# Altium PCB Solar_PowerBoard_JK.PcbDoc
Units mil, origin at the board's own origin, x right, y up, seen from the top; angles counter-clockwise.
Board outline 1417.32 x 2000 mil, 2 copper layers (Top Layer, Bottom Layer), stack 68.512 mil thick; 32 components, 10 nets, 67 pads, 329 vias.
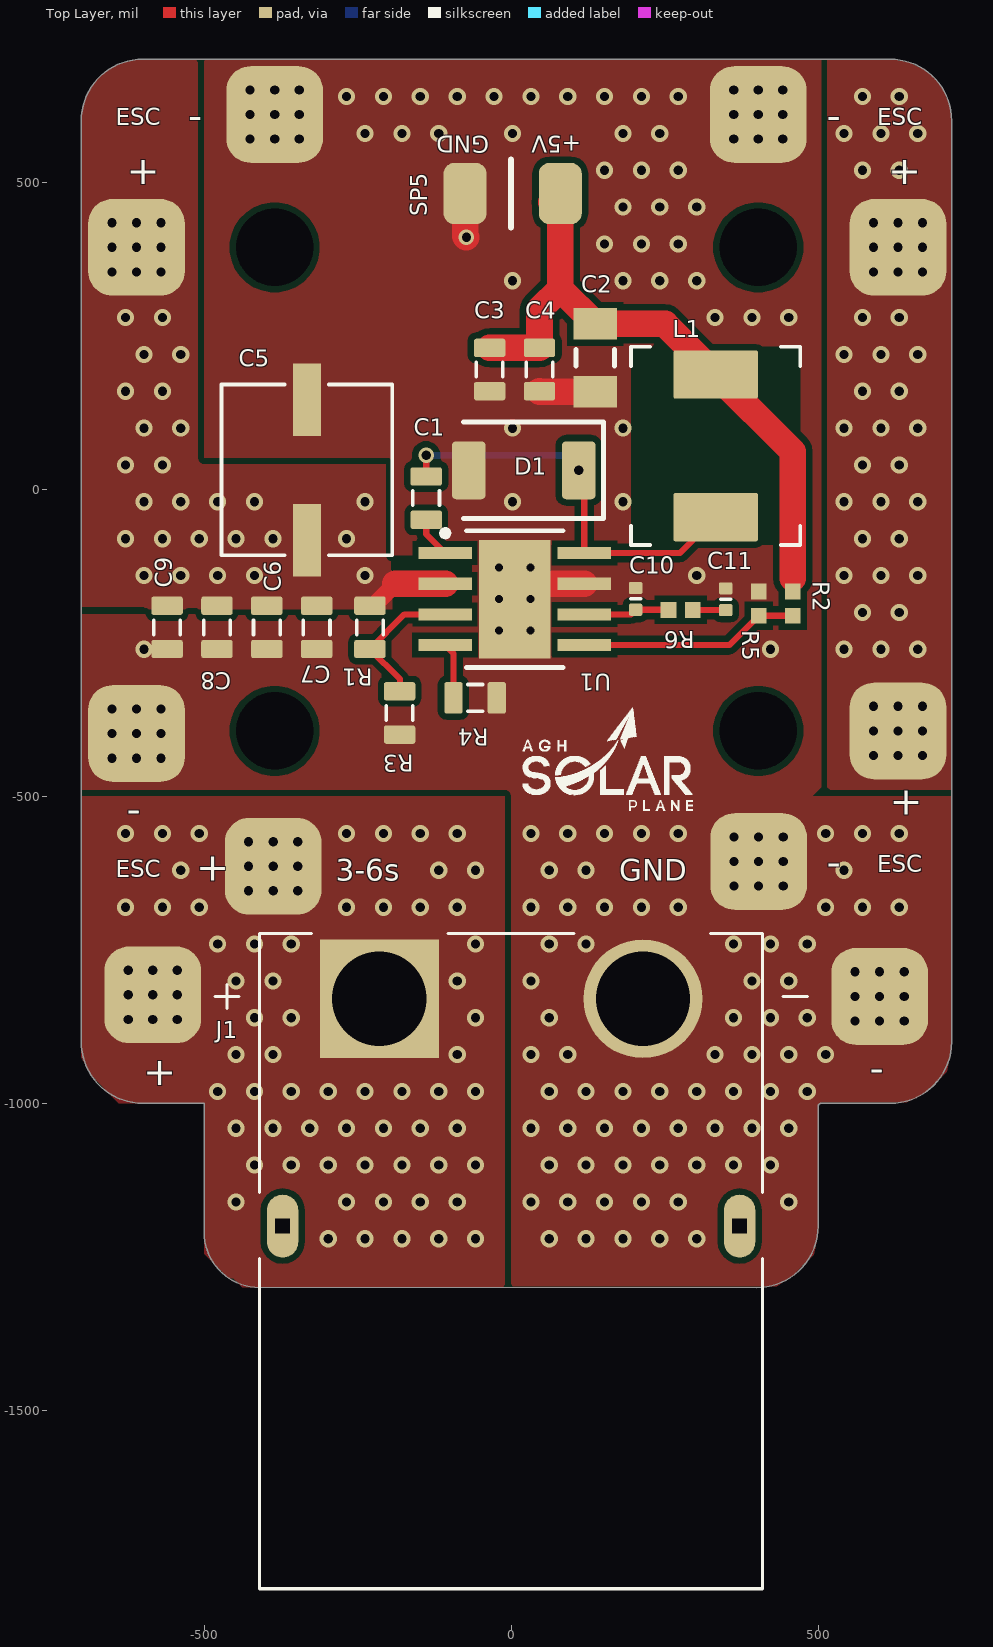
[diagram p0: Top Layer view]
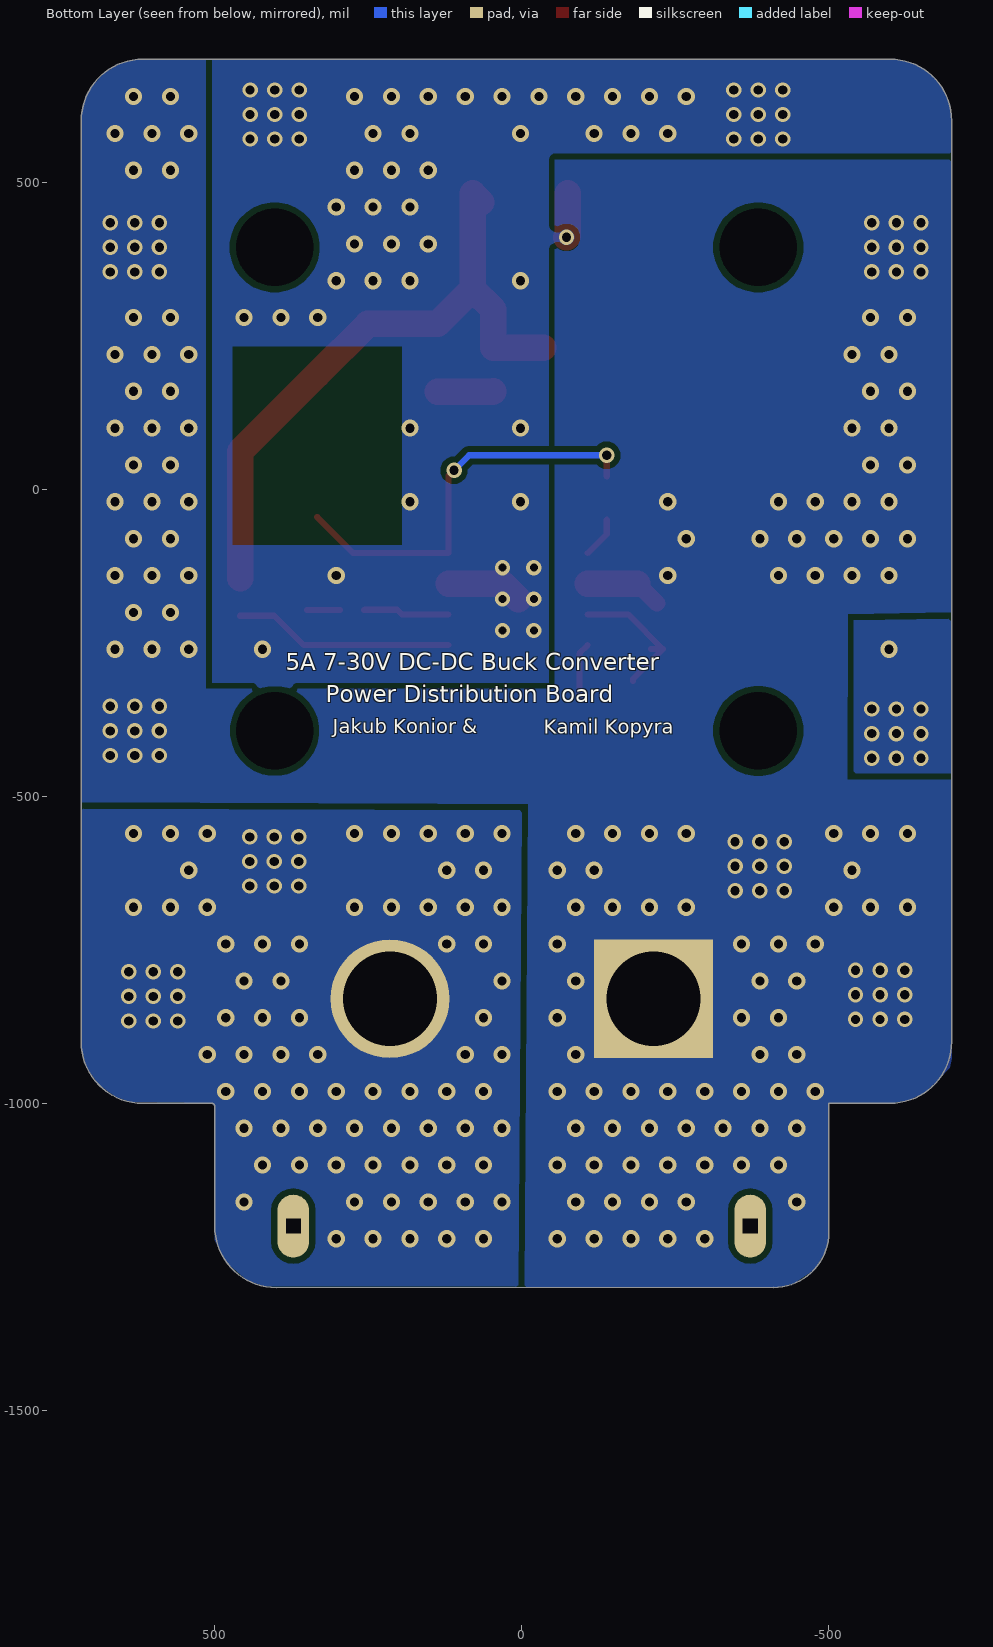
[diagram p1: Bottom Layer view, seen from below]
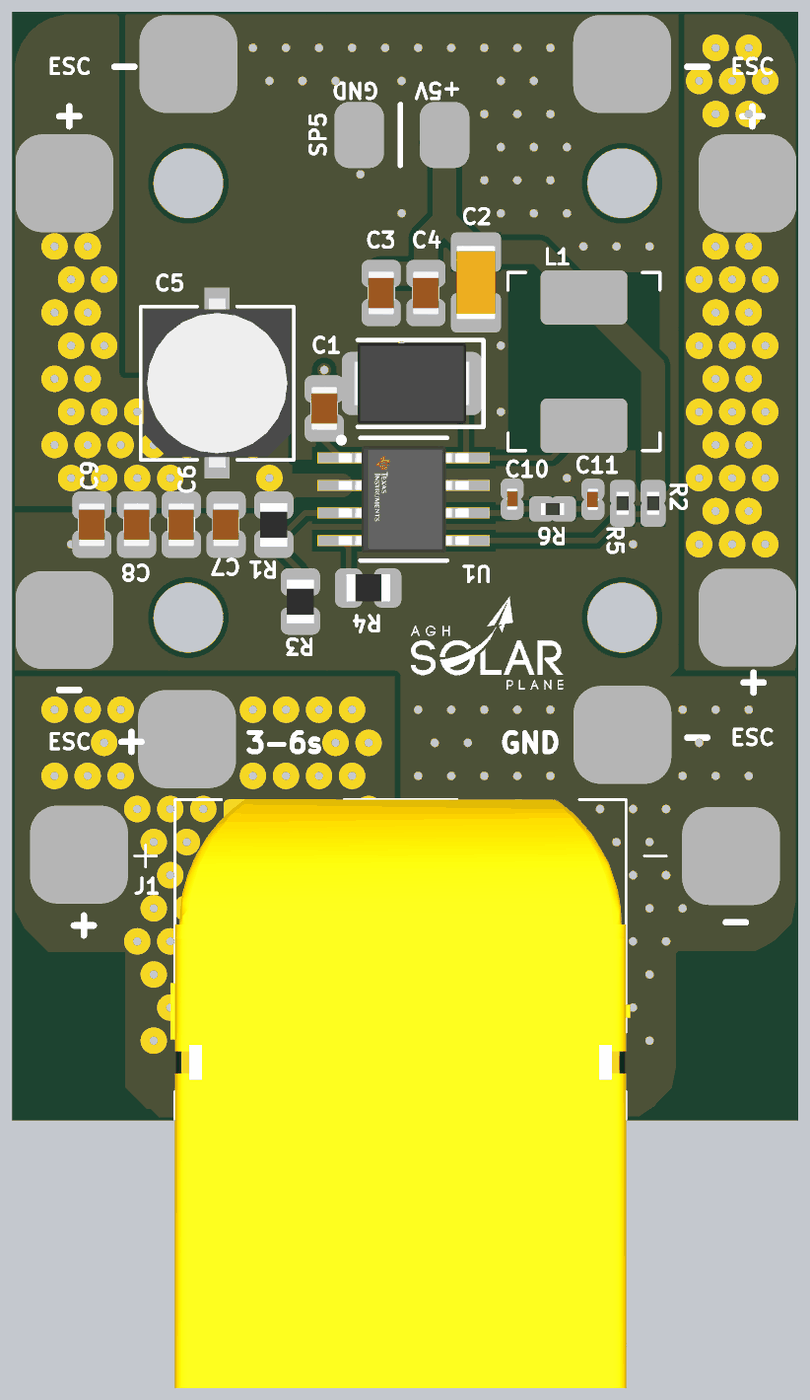
[diagram p2: 3D render of the assembled board from above, using the file's embedded part models]

## Layer stack, top to bottom
Top Solder: solder mask 0.5, Solder Resist, Dk 3.3
Top Layer: signal copper 2.7559
Dielectric1: core 63, FR-4, Dk 4.3
Bottom Layer: signal copper 2.7559
Bottom Solder: solder mask 0.5, Solder Resist, Dk 3.3

## Board outline
-500,-1209.82 ccw(c-409.82,-1209.82) -409.82,-1300 ccw(c-409.82,-1299.63) -409.45,-1299.63 400,-1300 ccw(c400,-1200) 500,-1200 500,-1004.92 cw(c504.92,-1004.92) 504.92,-1000 617.32,-1000 ccw(c617.32,-900) 717.32,-900 717.32,600 ccw(c617.32,600) 617.32,700 -600,700 ccw(c-600,600) -700,600 -700,-900 ccw(c-600,-900) -600,-1000 -500,-1000

## Design rules (kind name [scope] priority, off if disabled: settings)
Clearance [All] p1: gap=10 ignorepadtopadclearanceinfootprint=FALSE
DiffPairsRouting [All] p1: maxlimit=10 minlimit=10 mostfreqgap=10 toplayer_minwidth=10 toplayer_maxwidth=10 toplayer_prefwidth=10 bottomlayer_minwidth=10 bottomlayer_maxwidth=10 bottomlayer_prefwidth=10 maxuncoupledlength=500
HoleSize [All] p1: absolutevalues=TRUE maxlimit=300 minlimit=6 maxpercent=80.000 minpercent=20.000
MinimumAnnularRing [All] p1: minimumring=5
MinimumSolderMaskSliver [All] p1: minsoldermaskwidth=5.9
PasteMaskExpansion [All] p1: expansion=10
PlaneClearance [All] p1: clearance=15
PlaneConnect [All] p1: pad.planeconnectstyle=Relief pad.reliefexpansion=20 pad.reliefentries=4 pad.reliefconductorwidth=10 pad.reliefairgap=10 via.planeconnectstyle=Direct via.reliefexpansion=20 via.reliefentries=4 via.reliefconductorwidth=10 via.reliefairgap=10
PolygonConnect [All] p1: connectstyle=Direct reliefconductorwidth=10 reliefentries=4 polygonreliefangle="90 Angle" airgapwidth=10
RoutingVias [All] p1: holewidth=10 width=20 viastyle="Through Hole" minholewidth=10 minwidth=10 maxholewidth=15 maxwidth=30
SMDNeckDown [All] p1: percent=250.000
SilkToSilkClearance [All] p1: silktosilkclearance=6
SilkToSolderMaskClearance SilkscreenOverComponentPads [IsPad] p1: minsilkscreentomaskgap=4 clearancetoexposedcopper=TRUE
SolderMaskExpansion [All] p1: expansion=10 istentingtop=FALSE
SupplyNets "Schematic Supply Nets_3" [InNet('GND')] p1: voltage=0.000
SupplyNets "Schematic Supply Nets_2" [InNet('VOUT')] p2: voltage=0.000
SupplyNets "Schematic Supply Nets_1" [InNet('VIN')] p3: voltage=0.000
Width [All] p1: maxlimit=43.31 minlimit=10 preferedwidth=35.43
22 further rules are at their usual default settings.

## Classes and differential pairs
component class TPS54560_5V_optymalizacja: + - C1 C2 C3 C4 C5 C6 C7 C8 C9 C10 C11 D1 J1 L1 R1 R2 R3 R4 R5 R6 SP5 U1

## Components (designator, comment, footprint, x,y, rotation, side; value= is the part's Value field where it differs from the comment)
+ "SolderPad" SolderPad -583.52,-823.37 r0 top (schematic designator SP15)
+ "SolderPad" SolderPad 630,-393.7 r0 top (schematic designator SP8)
+ "SolderPad" SolderPad 630,393.7 r0 top (schematic designator SP6)
+ "SolderPad" SolderPad -610,393.7 r0 top (schematic designator SP3)
+ "SolderPad" SolderPad -387.43,-614.06 r0 top (schematic designator SP1)
- "SolderPad" SolderPad 600,-825.98 r0 top (schematic designator SP16)
- "SolderPad" SolderPad 402.99,-606.3 r0 top (schematic designator SP9)
- "SolderPad" SolderPad 402.36,610 r0 top (schematic designator SP7)
- "SolderPad" SolderPad -385.04,610 r0 top (schematic designator SP4)
- "SolderPad" SolderPad -610,-398.06 r0 top (schematic designator SP2)
C1 "Capacitor 100nF +/-40% 6.3V 0805" CAPC0805(2012)145_L -138.29,-14.41 r90 top value=100nF
C2 "Capacitor 220 uF +/- 10% 16 V 1206" CAPC3216X180X50NL20T25 137.05,213.94 r90 top value=220µF
C3 "Capacitor 47µF +/-40% 6.3V 0805" CAPC0805(2012)145_L -34.99,194.93 r90 top value=47µF
C4 "Capacitor 47µF +/-40% 6.3V 0805" CAPC0805(2012)145_L 46.19,194.93 r90 top value=47µF
C5 "EEE-FT1V101AP" CapBulk -332.68,31.28 r90 top
C6 "Capacitor 2.2µF +/-40% 35V 0805" CAPC0805(2012)145_L -397.82,-225.3 r270 top value=2.2µF
C7 "Capacitor 2.2µF +/-40% 35V 0805" CAPC0805(2012)145_L -316.6,-225.3 r270 top value=2.2µF
C8 "Capacitor 2.2µF +/-40% 35V 0805" CAPC0805(2012)145_L -479,-225.3 r270 top value=2.2µF
C9 "Capacitor 2.2µF +/-40% 35V 0805" CAPC0805(2012)145_L -560.18,-225.3 r270 top value=2.2µF
C10 "Capacitor 15pF +/-20% 10V 0402" CAPC0402(1005)60_L 202.76,-178.66 r270 top value=15pF
C11 "Capacitor 15pF +/-20% 10V 0402" CAPC0402(1005)60_L 349.37,-179.28 r270 top value=6.8nF
D1 "SK54-3G" SK54-3G 32.72,23.46 r180 top
J1 "XT90PW-M" AMASS_XT90PW-M 0,-1200 r0 top
L1 "Inductor 5.6uH" SUSUMU-PCMB063T_V 333.08,70.51 r90 top value=5.6µH
R1 "Resistor 442kR +/-5% 0805 125 mW" RESC0805(2012)_L -229.9,-225.3 r270 top value=442k
R2 "Resistor 52.3k +/-1% 0402 100 mW" RESC1005X40X25ML05T05 458.58,-186.49 r90 top value=52.3k
R3 "Resistor 90.9 kOhms  +/-5 % 0805 125 mW" RESC0805(2012)_L -181.59,-364.65 r270 top value=90.9k
R4 "Resistor 121 kOhms  +/-5 % 0805 125 mW" RESC0805(2012)_L -58.43,-339.84 r0 top value=121k
R5 "Resistor 10k +/-1% 0402 100 mW" RESC1005X40X25ML05T05 402.99,-186.49 r270 top value=10k
R6 "Resistor 28.7k +/-1% 0402 100 mW" RESC1005X40X25ML05T05 276.06,-196.75 r180 top value=28.7k
SP5 "5VOUT" 5VOUT 0,481.3 r180 top
U1 "TPS54560DDA" FP-DDA0008E-MFG 5.91,-179.09 r0 top

## Footprints (in the part's own frame and the unit in brackets; to place one, negate y for a bottom-side part, rotate by r counter-clockwise, add the part's x,y. Pads: shape width x height; smd on the part's side, far side on the other; paste and mask are expansions set on the pad)
5VOUT [mil]
  rrect50% 70x100 smd: 1(-80,0) 2(75,0)
  silkscreen extent 0,-55 0,55
AMASS_XT90PW-M [mm]
  round 4.916 hole 3.9: N(5.45,9.4)
  rect 4.916x4.916 / inner round 4.916 / far side rect 4.916x4.916 hole 3.9: P(-5.45,9.4)
  oval 1.3x2.6 hole 0.6 square: S1(-9.45,0) S2(9.45,0)
  silkscreen extent -12.25,-15 12.25,12.1, body extent -10.6,-15 10.6,12.1, height 10.3
CapBulk [mil]
  rect 117.75x45.75 smd paste+0 mask+0: 1(-114.31,0) 2(114.31,0)
  silkscreen extent -139,-139 139,139, body extent -154,-134 154,134, height 242
CAPC0402(1005)60_L [mm] "Chip Capacitor, Body 1.0x0.5mm, Height 0.6mm, IPC High Density"
  rrect25% 0.5x0.55 smd: 1(-0.45,0) 2(0.45,0)
  silkscreen extent 0,-0.2 0,0.2, body extent -0.5,-0.25 0.5,0.25, height 0.6
CAPC0805(2012)145_L [mm] "Chip Capacitor, Body 2.0x1.2mm, Height 1.45mm, IPC High Density"
  rrect25% 0.76x1.3 smd: 1(-0.9,0) 2(0.89,0)
  silkscreen extent -0.3,-0.55 0.3,0.55, body extent -1,-0.6 1,0.6, height 1.45
CAPC3216X180X50NL20T25 [mm] "Chip Capacitor, 2-Leads, Body 3.40x1.80mm, IPC Medium Density"
  rect 1.3x1.8 smd: 1(-1.4,0) 2(1.4,0)
  silkscreen extent -0.35,-0.8 0.35,0.8, body extent -1.7,-0.9 1.7,0.9, height 1.8
FP-DDA0008E-MFG [mm]
  rect 2.2x0.5 smd paste-1000 mask+0: 1(-2.875,1.905) 2(-2.875,0.635) 3(-2.875,-0.635) 4(-2.875,-1.905) 5(2.875,-1.905) 6(2.875,-0.635) 7(2.875,0.635) 8(2.875,1.905)
  rect 2.95x4.9 smd paste-1000 mask-1000: 9(0,0)
  silkscreen extent -3,-2.83 2,2.85, body extent -4.08,-2.68 4.08,2.68, height 0.25
RESC0805(2012)_L [mm] "Chip Resistor, Body 2.0x1.3mm, IPC High Density"
  rrect25% 0.76x1.3 smd: 1(-0.9,0) 2(0.89,0)
  silkscreen extent -0.3,-0.55 0.3,0.55, body extent -1,-0.62 1,0.63, height 0.6
RESC1005X40X25ML05T05 [mm] "Chip Resistor, 2-Leads, Body 1.05x0.55mm, IPC Low Density"
  rect 0.65x0.65 smd: 1(-0.5,0) 2(0.5,0)
  body extent -0.53,-0.28 0.53,0.28, height 0.4
SK54-3G [mm]
  rrect25% 1.4x2.4 smd: 1(2.582,-0.184) 2(-1.968,-0.184)
  silkscreen extent -2.99,-2.18 2.81,1.82, body extent -2.39,-2.03 3.01,1.67, height 2.18
SolderPad [mm]
  rrect50% 4x4 smd: 1(0,0)
SUSUMU-PCMB063T_V [mm] "SMD, 2-Leads, Body 7.8x6.7mm"
  rrect8% 2x3.5 smd: 1(-2.95,0) 2(2.95,0)
  silkscreen extent -4.1,-3.5 4.1,3.5, body extent -3.65,-3.4 3.65,3.4, height 3

## Part data
C1: library part CMP-001-00085-1, "Chip Capacitor, 100nF +/-40%, 6.3V, 0805, Thickness 1.45 mm", Case/Package=0805, Max Operating Temperature=85°C, Min Operating Temperature=-55°C, Tolerance=10%, Voltage Rating=6.3V, Mounting Technology=SMT, Pins=2
C2: library part CMP-001-00088-1, "Chip Capacitor, 220 uF, +/- 10%, 16 V, 1206 (3216 Metric)", Capacitor Type=Ceramic, Case/Package=1206, Max Operating Temperature=125°C, Min Operating Temperature=-55°C, Tolerance=10%, Voltage Rating=16V, Mounting Technology=SM, Pins=2, RoHS Compliant=True
C3 C4: library part CMP-001-00082-4, "Chip Capacitor, 47µF +/-40%, 6.3V, 0805, Thickness 1.45 mm", Case/Package=0805, Max Operating Temperature=85°C, Min Operating Temperature=-55°C, Tolerance=10%, Voltage Rating=6.3V, Mounting Technology=SMT, Pins=2
C5: "Description", Manufacturer_Name=Panasonic, Copyright="Copyright (C) 2025 Ultra Librarian. All rights reserved.", Manufacturer_Part_Number=EEE-FT1V101AP
C6 C7 C8 C9: library part CMP-001-00089-1, "Chip Capacitor, 2.2µF +/-40%, 35V, 0805, Thickness 1.45 mm", Case/Package=0805, Max Operating Temperature=85°C, Min Operating Temperature=-55°C, Tolerance=20%, Voltage Rating=35V, Mounting Technology=SMT, Pins=2
C10 C11: library part CMP-001-00087-1, "Chip Capacitor, 15pF +/-20%, 10V, 0402, Thickness 0.6 mm", Case/Package=0402, Max Operating Temperature=85°C, Min Operating Temperature=-55°C, Tolerance=20%, Voltage Rating=10V, Mounting Technology=SMT, Pins=2
D1: library part Diode
J1: library part CMP-002-00071-1, "Socket; DC supply; XT90; male; PIN: 2; on PCBs; THT; Colour: yellow", Case/Package=Package, Check_prices=https://www.snapeda.com/parts/XT90PW-M/AMASS/view-part/?ref=eda, Component Type=Standard, Design Item ID=XT90PW-M, MF=AMASS, MP=XT90PW-M, Pins=2, SnapEDA_Link=https://www.snapeda.com/parts/XT90PW-M/AMASS/view-part/?ref=snap, Source=XT90PW-M.SchLib
L1: library part CMP-006-00023-1, "Shielded Wirewound Inductor, 5.6 uH, +/- 20%, -20 to 120 degC, 2-Pin SMD, RoHS, Tape and Reel", Case/Package=SMD/SMT, Tolerance=20%, Pins=2
R1: library part CMP-009-00178-1, "Chip Resistor, 442 kOhms, +/-5%, 125 mW, -55 to 155 degC, 0805", Case/Package=0805, Max Operating Temperature=155°C, Min Operating Temperature=-55°C, Power=125mW, Tolerance=5%, Pins=2
R2: library part CMP-009-00183-2, "Chip Resistor, 52.3 KOhm, +/- 1%, 0.1 W, -55 to 155 degC, 0402 (1005 Metric)", Case/Package=0402, Max Operating Temperature=155°C, Min Operating Temperature=-55°C, Power=100mW, Tolerance=1%, Voltage Rating=50V, Mounting Technology=SM, Pins=2, RoHS Compliant=True
R3: library part CMP-009-00180-1, "Chip Resistor, 90.9 kOhms, +/-5 %, 125 mW, -55 to 155 degC, 0805", Case/Package=0805, Max Operating Temperature=155°C, Min Operating Temperature=-55°C, Power=125mW, Tolerance=5%, Pins=2
R4: library part CMP-009-00184-1, "Chip Resistor, 121 kOhms, +/-5 %, 125 mW, -55 to 155 degC, 0805", Case/Package=0805, Max Operating Temperature=155°C, Min Operating Temperature=-55°C, Power=125mW, Tolerance=5%, Pins=2
R5: library part CMP-009-00015-5, "Chip Resistor, 10 KOhm, +/- 1%, 0.1 W, -55 to 155 degC, 0402 (1005 Metric)", Case/Package=0402, Max Operating Temperature=155°C, Min Operating Temperature=-55°C, Power=100mW, Tolerance=1%, Voltage Rating=50V, Mounting Technology=SM, Pins=2, RoHS Compliant=True
R6: library part CMP-009-00182-1, "Chip Resistor, 28.7 KOhm, +/- 1%, 0.1 W, -55 to 155 degC, 0402 (1005 Metric)", Case/Package=0402, Max Operating Temperature=155°C, Min Operating Temperature=-55°C, Power=100mW, Tolerance=1%, Voltage Rating=50V, Mounting Technology=SM, Pins=2, RoHS Compliant=True
U1: library part CMP-04918-000033-1, "IC REG BCK SPLIT RAIL ADJ 8SOPWR", Manufacturer="Texas Instruments", Max Junction Temp=+150°C, Max Supply Voltage=60V, Min Supply Voltage=4.5V, Nominal Supply Current=146uA, Output Current=5A, Output Voltage=0.8-58.8V, Package=DDA0008E, Switching Frequency=100-2500kHz, Temperature="-40°C to +125°C", Temperature Range High=+125°C, Temperature Range Low=-40°C, Automotive=No, Category=IC, ComponentLink2Description=Datasheet, ComponentLink2URL=http://www.ti.com/lit/ds/symlink/tps54560.pdf, Device Class L1="Integrated Circuits (ICs)", Device Class L2="Power Management ICs", Device Class L3="Voltage Regulators - Switching", Digikey Description="IC REG BCK SPLIT RAIL ADJ 8SOPWR", Height=1.7mm, Ipc Land Pattern Name=SOIC127P600X170-8, Lead Free=Yes, Manufacturer Part Number=TPS54560DDA, Max Duty Cycle=100%, Mouser Description="Voltage Regulators - Switching Regulators 60V Input 5 A SD DC-DC Cnvtr", Number Of Outputs=1, Octopart=https://octopart.com/tps54560dda-texas+instruments-26977150, Output Type=AdjustableProgrammable, RoHS=TRUE, Standoff Height=0mm, Switching Topology=Buck

## Free pads (board coordinates)
  round 60 hole 125.98: 5(-385.04,393.7) 6(402.36,393.7) 7(402.36,-393.7) 8(-385.04,-393.7)

## Via types
v1: diameter 28, hole 15, Top Layer to Bottom Layer, 230 vias
v2: diameter 25, hole 15, Top Layer to Bottom Layer, tented both sides, 93 vias
v3: diameter 24.8, hole 12.99, Top Layer to Bottom Layer, 6 vias

## Nets (pads, with @x,y where several pads share a name; then routed paths per layer and width w, separated by ;. In a path a pad name is that pad's centre, name@x,y a point inside that pad or via, vN(x,y) a via of type N, cw(c..) or ccw(c..) an arc to the next point about the centre after c; other vN are vias at no path point)
COMP: C10.2 R6.2 U1.6 | length 140.6
  Top Layer w10: U1.6 195.04,-204.09 C10.2 256.01,-196.37 R6.2
FB: R2.1 R5.2 U1.5 | length 359.3
  Top Layer w10: U1.5 355.07,-254.09 R5.2 R2.1
GND: -.1 C2.1 C3.1 C4.1 C5.2 C6.2 C7.2 C8.2 C9.2 C10.1 C11.1 D1.1 J1.N R3.2 R4.2 R5.1 SP5.2 U1.7 U1.9 | length 286.9
  Top Layer w43.31: SP5.2 -75,412.17 v2(-72.83,410) ; U1.9 30.91,-154.09 U1.7 ; C4.1 46.87,158.82 C2.1
  other v1: 62.13,-1220.71 122.13,-1220.71 182.13,-1220.71 242.13,-1220.71 302.13,-1220.71 32.13,-1160.71 92.13,-1160.71 152.13,-1160.71 212.13,-1160.71 272.13,-1160.71 452.13,-1160.71 62.13,-1100.71 122.13,-1100.71 182.13,-1100.71 242.13,-1100.71 302.13,-1100.71 362.13,-1100.71 422.13,-1100.71 32.13,-1040.71 92.13,-1040.71 152.13,-1040.71 212.13,-1040.71 272.13,-1040.71 332.13,-1040.71 392.13,-1040.71 452.13,-1040.71 62.13,-980.71 122.13,-980.71 182.13,-980.71 242.13,-980.71 302.13,-980.71 362.13,-980.71 422.13,-980.71 482.13,-980.71 32.13,-920.71 92.13,-920.71 332.13,-920.71 392.13,-920.71 452.13,-920.71 512.13,-920.71 62.13,-860.71 362.13,-860.71 422.13,-860.71 482.13,-860.71 32.13,-800.71 392.13,-800.71 452.13,-800.71 62.13,-740.71 122.13,-740.71 362.13,-740.71 422.13,-740.71 482.13,-740.71 32.13,-680.71 92.13,-680.71 152.13,-680.71 212.13,-680.71 272.13,-680.71 512.13,-680.71 572.13,-680.71 632.13,-680.71 62.13,-620.71 122.13,-620.71 542.13,-620.71 32.13,-560.71 92.13,-560.71 152.13,-560.71 212.13,-560.71 272.13,-560.71 512.13,-560.71 572.13,-560.71 632.13,-560.71 -597.87,-260.71 422.13,-260.71 302.13,-140.71 2.13,-20.71 182.13,-20.71 2.13,99.29 182.13,99.29 332.13,279.29 392.13,279.29 452.13,279.29 2.13,339.29 182.13,339.29 242.13,339.29 302.13,339.29 152.13,399.29 212.13,399.29 272.13,399.29 182.13,459.29 242.13,459.29 302.13,459.29 152.13,519.29 212.13,519.29 272.13,519.29 -237.87,579.29 -177.87,579.29 -117.87,579.29 2.13,579.29 182.13,579.29 242.13,579.29 -267.87,639.29 -207.87,639.29 -147.87,639.29 -87.87,639.29 -27.87,639.29 32.13,639.29 92.13,639.29 152.13,639.29 212.13,639.29 272.13,639.29
  other v2: 560,-865.98 600,-865.98 640,-865.98 560,-825.98 600,-825.98 640,-825.98 560,-785.98 600,-785.98 640,-785.98 362.99,-646.3 402.99,-646.3 442.99,-646.3 362.99,-606.3 402.99,-606.3 442.99,-606.3 362.99,-566.3 402.99,-566.3 442.99,-566.3 -650,-438.06 -610,-438.06 -570,-438.06 -650,-398.06 -610,-398.06 -570,-398.06 -650,-358.06 -610,-358.06 -570,-358.06 -425.04,570 -385.04,570 -345.04,570 362.36,570 402.36,570 442.36,570 -425.04,610 -385.04,610 -345.04,610 362.36,610 402.36,610 442.36,610 -425.04,650 -385.04,650 -345.04,650 362.36,650 402.36,650 442.36,650
  other v3: -19.69,-230.28 31.5,-230.28 -19.69,-179.09 31.5,-179.09 -19.69,-127.91 31.5,-127.91
NetC1_1: C1.1 U1.1 | length 67.1
  Top Layer w10: C1.1 -138.29,-73.09 U1.1
NetC1_2: C1.2 D1.2 L1.1 U1.8 | length 672.6
  Top Layer w10: C1.2 v2(-138.29,55.12) v2@-136.33,53.16 ; v2(110.2,30.71) 119.09,21.81 U1.8 274.61,-104.09 L1.1
  Bottom Layer w10: v2(-138.29,55.12) 85.78,55.12 v2(110.2,30.71)
NetC11_2: C11.2 R6.1 | length 53.7
  Top Layer w10: R6.1 349.12,-196.75 C11.2
NetR1_2: R1.2 R3.1 U1.3 | length 237.6
  Top Layer w10: R1.2@-210.71,-260.34 R1.2 ; -181.21,-312.63 -181.21,-309.03 R1.2 ; U1.3 -173.66,-204.09 R1.2
NetR4_1: R4.1 U1.4 | length 91.3
  Top Layer w10: U1.4 -93.86,-267.52 R4.1
VIN: +.1 C5.1 C6.1 C7.1 C8.1 C9.1 J1.P R1.1 U1.2 | length 127.8
  Top Layer w11.81: R1.1@-221.98,-185.77 R1.1@-220.02,-185.77
  Top Layer w27.56: R1.1@-220.02,-185.77 -188.34,-154.09
  Top Layer w43.31: -188.34,-154.09 U1.2
  other v1: -297.87,-1220.71 -237.87,-1220.71 -177.87,-1220.71 -117.87,-1220.71 -57.87,-1220.71 -447.87,-1160.71 -267.87,-1160.71 -207.87,-1160.71 -147.87,-1160.71 -87.87,-1160.71 -417.87,-1100.71 -357.87,-1100.71 -297.87,-1100.71 -237.87,-1100.71 -177.87,-1100.71 -117.87,-1100.71 -57.87,-1100.71 -447.87,-1040.71 -387.87,-1040.71 -327.87,-1040.71 -267.87,-1040.71 -207.87,-1040.71 -147.87,-1040.71 -87.87,-1040.71 -477.87,-980.71 -417.87,-980.71 -357.87,-980.71 -297.87,-980.71 -237.87,-980.71 -177.87,-980.71 -117.87,-980.71 -57.87,-980.71 -447.87,-920.71 -387.87,-920.71 -87.87,-920.71 -417.87,-860.71 -357.87,-860.71 -57.87,-860.71 -447.87,-800.71 -387.87,-800.71 -87.87,-800.71 -477.87,-740.71 -417.87,-740.71 -357.87,-740.71 -57.87,-740.71 -627.87,-680.71 -567.87,-680.71 -507.87,-680.71 -267.87,-680.71 -207.87,-680.71 -147.87,-680.71 -87.87,-680.71 -537.87,-620.71 -117.87,-620.71 -57.87,-620.71 -627.87,-560.71 -567.87,-560.71 -507.87,-560.71 -267.87,-560.71 -207.87,-560.71 -147.87,-560.71 -87.87,-560.71 542.13,-260.71 602.13,-260.71 662.13,-260.71 572.13,-200.71 632.13,-200.71 -597.87,-140.71 -537.87,-140.71 -477.87,-140.71 -417.87,-140.71 -237.87,-140.71 542.13,-140.71 602.13,-140.71 662.13,-140.71 -627.87,-80.71 -567.87,-80.71 -507.87,-80.71 -447.87,-80.71 -387.87,-80.71 -267.87,-80.71 572.13,-80.71 632.13,-80.71 -597.87,-20.71 -537.87,-20.71 -477.87,-20.71 -417.87,-20.71 -237.87,-20.71 542.13,-20.71 602.13,-20.71 662.13,-20.71 -627.87,39.29 -567.87,39.29 572.13,39.29 632.13,39.29 -597.87,99.29 -537.87,99.29 542.13,99.29 602.13,99.29 662.13,99.29 -627.87,159.29 -567.87,159.29 572.13,159.29 632.13,159.29 -597.87,219.29 -537.87,219.29 542.13,219.29 602.13,219.29 662.13,219.29 -627.87,279.29 -567.87,279.29 572.13,279.29 632.13,279.29 572.13,519.29 632.13,519.29 542.13,579.29 602.13,579.29 662.13,579.29 572.13,639.29 632.13,639.29
  other v2: -623.52,-863.37 -583.52,-863.37 -543.52,-863.37 -623.52,-823.37 -583.52,-823.37 -543.52,-823.37 -623.52,-783.37 -583.52,-783.37 -543.52,-783.37 -427.43,-654.06 -387.43,-654.06 -347.43,-654.06 -427.43,-614.06 -387.43,-614.06 -347.43,-614.06 -427.43,-574.06 -387.43,-574.06 -347.43,-574.06 590,-433.7 630,-433.7 670,-433.7 590,-393.7 630,-393.7 670,-393.7 590,-353.7 630,-353.7 670,-353.7 -650,353.7 -610,353.7 -570,353.7 590,353.7 630,353.7 670,353.7 -650,393.7 -610,393.7 -570,393.7 590,393.7 630,393.7 670,393.7 -650,433.7 -610,433.7 -570,433.7 590,433.7 630,433.7 670,433.7
VOUT: C2.2 C3.2 C4.2 L1.2 R2.2 SP5.1 | length 1061.3
  Top Layer w43.31: C3.2 C4.2 46.19,292.29 80,326.11 ; SP5.1@65.73,467.03 SP5.1 80,326.11 ; 458.58,-145.15 458.58,61.15 L1.2 250.67,269.06 C2.2 80,326.11
pads on no net: J1.S1 J1.S2

## Polygon pours and split planes (outlines as drawn)
GND on Top Layer "GND_L01_P025" (solid, pour order 25): -499.67,700 -500,699.67 -500,50.83 -198.68,50.83 -193.68,45.83 -193.68,-107.72 -64.16,-107.72 -63.7,-107.27 -62.97,-108 -62.97,-203.49 -700,-203.49 -700,-290.32 -700,-500 489.99,-500 504.92,-485.07 504.92,700 -498.58,700
GND on Top Layer "GND_L01_P023" (solid, pour order 23): 717.32,-498.84 716.17,-500 0,-500 0,-1299.85 0.36,-1300.21 2.45,-1298.12 432.54,-1298.12 455.56,-1283.15 463.75,-1277.68 463.75,-1274.96 492.39,-1246.32 498.08,-1219.51 500,-1209.85 500,-1003.02 504.94,-998.08 644.57,-998.08 664.46,-988.19 681.07,-977.68 709.71,-949.03 717.32,-909.85 717.32,-900 717.32,-499.76
VIN on Top Layer "VIN_L01_P024" (solid, pour order 24): 0,-500 -700,-500 -700,-925.33 -692.39,-938.27 -683.15,-955.56 -638.7,-1000 -500,-1000 -500,-1244.72 -459.92,-1284.8 -452.66,-1284.8 -437.82,-1299.64 -0.21,-1299.64 0,-1299.85
VIN on Top Layer "VIN_L01_P026" (solid, pour order 26): -700,609.85 -696.3,626.95 -687.81,647.84 -672.77,668.59 -657.09,682.1 -637.51,692.7 -609.85,700 -500,699.67 -500,50.83 -497.5,48.33 -196.18,48.33 -196.18,-192.74 -197.27,-191.64 -700,-191.64
VIN on Top Layer "VIN_L01_P027" (solid, pour order 27): 504.92,700 621.99,700 647.1,695.46 671.74,683.89 692.07,666.43 705.62,646.94 713.78,626.38 717.32,609.85 717.32,-498.84 504.92,-498.84
GND on Top Layer "GND_L01_P000" (solid, pour order 0): -52.58,-90.91 -52.58,90.2 -356.68,90.2 -356.68,165.28 65.87,165.28 65.87,-90.91
VIN on Top Layer "VIN_L01_P007" (solid, pour order 7): -600,-195.24 -599.68,-132.31 -192.04,-132.31 -193.68,-133.96 -193.68,-195.24 -536.76,-195.24
GND on Top Layer "GND_L01_P003" (solid, pour order 3): 65.87,-272.31 65.87,-415.18 -193.68,-415.18 -193.68,-385.4 -53.56,-385.4 -53.56,-351.59 -53.56,-272.17 65.73,-272.17
GND on Top Layer "GND_L01_P005" (solid, pour order 5): 161.42,-144.37 412.16,-144.1 416.07,-144.1 415.85,-165.82 415.18,-165.82 161.42,-163.27 161.42,-146.85 161.42,-141.75
VIN on Bottom Layer "VIN_L02_P029" (solid, pour order 29): -699.52,-473.01 -530,-473.01 -530.43,-203.5 -699.37,-200.63 -700,536.3 -54.11,536.3 -54.11,-510.2 -10.2,-510.2 -4.72,-1299.82 -417.95,-1299.63 -441.97,-1294.07 -476.27,-1270.78 -494.07,-1241.97 -500,-1223.81 -500,-1000 -603.62,-999.93 -632.57,-994.55 -656.15,-982.75 -679.01,-961.3 -696.72,-942.18 -699.78,-926.43
GND on Bottom Layer "GND_L02_P031" (solid, pour order 31): -700,609.85 -694.69,632.14 -683.82,654.54 -672.25,669.14 -657.81,681.6 -640.35,691.5 -623.85,697.11 -606.06,700 616.99,699.67 643.47,696.52 679.29,678.48 704.75,648.54 717.32,609.85 717.32,-908.12 708.39,-941.32 689.44,-969.27 658.64,-991.06 637.69,-997.9 504.92,-1000 500,-1004.92 500,-1222.79 480.02,-1259.97 447.14,-1288.19 419.29,-1298.12 -417.95,-1299.63 -450.31,-1290.4 -478.8,-1267.91 -490.4,-1250.31 -500,-1222.79 -500,-1000 -620.36,-997.9 -653.07,-984.76 -678.81,-961.55 -693.77,-934.74 -699.67,-908.12
VIN on Bottom Layer "VIN_L02_P030" (solid, pour order 30): 514.26,-325.08 514.26,700 627.17,700 652.57,693.58 680.97,677.13 702.7,652.07 712.36,631.1 717.32,609.85 717.32,-510.2 -59.47,-513.25 -59.47,-482.32 -59.47,-325.08 -52.58,-325.08

## Other copper
Top Layer:
  pour cut-out: 470.87,231.93 470.87,-90.91 195.28,-90.91 195.28,231.93
Bottom Layer:
  pour cut-out: 195.28,231.93 470.87,231.93 470.87,-90.91 195.28,-90.91

## Silkscreen, mask and mechanical layers (free items; w line width, h text height)
Top Overlay:
  drawing of 17 lines, arcs and shapes, not listed
  text "ESC" at -644.09,592.29 h27.56
  text "ESC" at 595.91,592.29 h27.56
  text "ESC" at 595.91,-624.09 h27.56
  text "ESC" at -644.09,-631.76 h27.56
  text "3-6s" at -285.77,-637.3 h35
  text "GND" at 176.43,-637.3 h35
Bottom Overlay:
  text "5A 7-30V DC-DC Buck Converter" at 384.09,-294.57 h27.56
  text "Power Distribution Board" at 318.9,-346.69 h27.56
  text "Jakub Konior &" at 307.49,-397.79 h23
  text "Kamil Kopyra" at -35.9,-398.63 h23
Board:
  lines w10: 617.32,-1000 ccw(c617.32,-900) 717.32,-900 717.32,-882.68 717.32,-350 717.32,581.3 717.32,600 ccw(c617.32,600) 617.32,700 598.62,700 -550,700 -600,700 ccw(c-600,600) -700,600 -700,550 -700,-900 ccw(c-600,-900) -600,-1000 -500,-1000 -500,-1150 -500,-1209.82 ccw(c-409.82,-1209.82) -409.82,-1300 ccw(c-409.82,-1299.63) -409.45,-1299.63 400,-1300 ccw(c400,-1200) 500,-1200 500,-1010.05 cw(c510.05,-1010.05) 510.05,-1000 600,-1000 617.32,-1000 ; 617.32,-1000 ccw(c617.32,-1000) 617.32,-1000 ; 617.32,-1000 617.32,-1000

## Text inside footprints (layer, text, board x,y; h text height)
SP5: Top Overlay "+5V" at 114.09,575.39 h27.56 r180; Top Overlay "GND" at -35.91,575.39 h27.56 r180